# Altium PCB PCB1.PcbDoc
Units mil, origin at the board's own origin, x right, y up, seen from the top; angles counter-clockwise.
Board outline 6000 x 4000 mil, 2 copper layers (Top Layer, Bottom Layer); 21 components, 16 nets, 67 pads, 0 vias.
Unrouted connection lines stored in the file: 37.
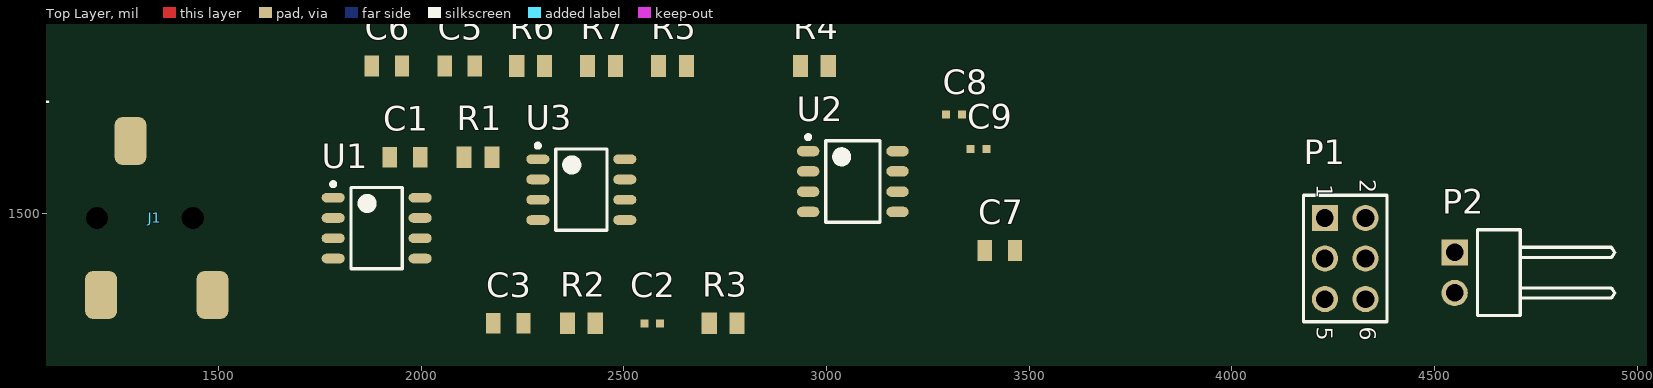
[diagram p0: Top Layer view]
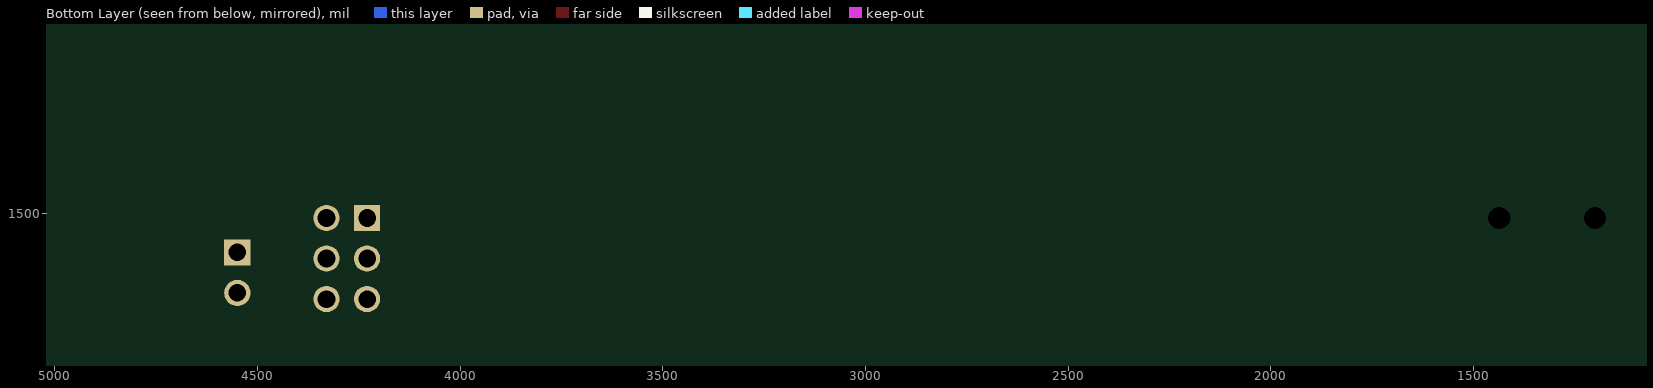
[diagram p1: Bottom Layer view, seen from below]

## Layer stack, top to bottom
Top Solder: solder mask 0.4, Solder Resist, Dk 3.5
Top Layer: signal copper 1.4
Dielectric 1: dielectric 12.6, FR-4, Dk 4.8
Bottom Layer: signal copper 1.4
Bottom Solder: solder mask 0.4, Solder Resist, Dk 3.5

## Board outline
1000,1000 7000,1000 7000,5000 1000,5000

## Design rules (kind name [scope] priority, off if disabled: settings)
Clearance [All] p1: gap=10 ignorepadtopadclearanceinfootprint=FALSE except(0: Arc-Hole Track-Hole SMDPad-Hole THPad-Hole Via-Hole Fill-Hole Poly-Hole Region-Hole Text-Hole)
PolygonConnect [All] p1: connectstyle=Relief reliefconductorwidth=10 reliefentries=4 polygonreliefangle="90 Angle" airgapwidth=10
RoutingVias [All] p1: holewidth=28 width=50 viastyle="Through Hole" minholewidth=28 minwidth=50 maxholewidth=28 maxwidth=50
SolderMaskExpansion [All] p1: expansion=4 istentingtop=FALSE
Width [All] p1: maxlimit=10 minlimit=10 preferedwidth=10
30 further rules are at their usual default settings.

## Components (designator, comment, footprint, x,y, rotation, side; value= is the part's Value field where it differs from the comment)
C1 "1uF" WCAP-CSGP_0805_H=1.25mm 1960,1640 r0 top
C2 "390nF" WCAP-CSGP_0402 2570,1230 r0 top
C3 "1uF" WCAP-CSGP_0805_H=1.25mm 2215,1230 r0 top
C5 "100nF" WCAP-CSGP_0805_H=1.25mm 2095,1865 r0 top
C6 "47uF" WCAP-CSGP_0805_H=1.25mm 1915,1865 r0 top
C7 "100nF" WCAP-CSGP_0805_H=1.25mm 3427.6,1410 r0 top
C8 "1nF" WCAP-CSGP_0402 3315,1745 r0 top
C9 "470pF" WCAP-CSGP_0402 3375,1660 r0 top
J1 "PJ-320B Audio Jack" "PJ-320B Audio Jack" 1280,1405 r270 top
P1 "61300621121" 61300621121 4280,1390 r270 top
P2 "61300211021" 61300211021 4659.06,1355 r90 top
R1 "100k" WRIS-PSMB_0805_H=0.22mm 2140,1640 r0 top
R2 "20k" WRIS-PSMB_0805_H=0.22mm 2395,1230 r0 top
R3 "20k" WRIS-PSMB_0805_H=0.22mm 2745,1230 r0 top
R4 "100k" WRIS-PSMB_0805_H=0.22mm 2970,1865 r0 top
R5 "100k" WRIS-PSMB_0805_H=0.22mm 2620,1865 r0 top
R6 "7.5k" WRIS-PSMB_0805_H=0.22mm 2270,1865 r0 top
R7 "7.5k" WRIS-PSMB_0805_H=0.22mm 2445,1865 r0 top
U1 "ATtiny102" ATtiny102 1890,1465 r0 top
U2 "TM8211" TM8211 3065,1580 r0 top
U3 "NS8002" NS8002 2395,1560 r0 top

## Footprints (in the part's own frame and the unit in brackets; to place one, negate y for a bottom-side part, rotate by r counter-clockwise, add the part's x,y. Pads: shape width x height; smd on the part's side, far side on the other; paste and mask are expansions set on the pad)
61300211021 [mm] "Pin Header, pitch 2.54 mm, THT, Angled, single row, 2p"
  rect 1.65x1.65 hole 1.1: 1(1.27,2.77)
  round 1.65 hole 1.1: 2(-1.27,2.77)
  silkscreen extent -2.69,-7.27 2.69,1.35, body extent -2.54,-7.27 2.54,3.09, height 2.58
61300621121 [mm] "Pin Header, pitch 2.54 mm, THT, Vertical, dual row, 6p"
  rect 1.65x1.65 hole 1.1: 1(-2.54,-1.27)
  round 1.65 hole 1.1: 2(-2.54,1.27) 3(0,-1.27) 4(0,1.27) 5(2.54,-1.27) 6(2.54,1.27)
  silkscreen extent -3.96,-2.62 3.96,2.62, body extent -3.81,-2.54 3.81,2.54, height 8.59
ATtiny102 [mm] "SOIC, 8-Leads, Body 4,93x3,90mm, Pitch 1,27mm, IPC Medium Density"
  oval 1.45x0.6 smd: 1(-2.725,1.905) 2(-2.725,0.635) 3(-2.725,-0.635) 4(-2.725,-1.905) 5(2.725,-1.905) 6(2.725,-0.635) 7(2.725,0.635) 8(2.725,1.905)
  silkscreen extent -2.85,-2.55 1.6,2.88, body extent -3,-2.55 3,2.55, height 1.75
NS8002 [mm] "Class AB 1.8W x 1 @ 4O 3V ~ 5.25V SOP-8_EP_150mil Audio Power OpAmps RoHSm, IPC Medium Density"
  oval 1.45x0.6 smd: 1(-2.725,1.905) 2(-2.725,0.635) 3(-2.725,-0.635) 4(-2.725,-1.905) 5(2.725,-1.905) 6(2.725,-0.635) 7(2.725,0.635) 8(2.725,1.905)
  silkscreen extent -2.85,-2.55 1.6,2.88, body extent -3,-2.55 3,2.55, height 1.7
"PJ-320B Audio Jack" [mil]
  rrect50% 118.11x78.74 smd: 1(105,-70) 2(-275,2.5) 3(105,205)
  round 0 hole 55.12: 3(-85,156.22) 3(-85,-80)
  body extent -303,-278 131,274, height 197
TM8211 [mm] "16-Bit SOP-8_150mil Digital To Analog Converter (DAC)"
  oval 1.4x0.65 smd: 1(-2.8,1.905) 2(-2.8,0.635) 3(-2.8,-0.635) 4(-2.8,-1.905) 5(2.8,-1.905) 6(2.8,-0.635) 7(2.8,0.635) 8(2.8,1.905)
  silkscreen extent -2.92,-2.55 1.7,2.9, body extent -3,-2.55 3,2.55, height 1.7
WCAP-CSGP_0402 [mm] "Ceramic Capacitors, body 1x0.5mm"
  rect 0.5x0.5 smd: 1(-0.5,0) 2(0.5,0)
  body extent -0.5,-0.25 0.5,0.25, height 0.5
WCAP-CSGP_0805_H=1.25mm [mm] "Ceramic Capacitors, body 2x1.25mm"
  rect 0.9x1.3 smd: 1(-0.95,0) 2(0.95,0)
  body extent -1,-0.62 1,0.63, height 1.25
WRIS-PSMB_0805_H=0.22mm [mm] "Metal Plate Resistor, SMT, body size 2x1.25mm"
  rect 0.95x1.36 smd: 1(-0.875,0) 2(0.875,0)
  body extent -1,-0.62 1,0.63, height 0.22

## Part data
C1 C3: library part 885012207022, "WCAP-CSGP General Purpose Ceramic Capacitors, size 0805, 1uF, +/-10%, 10VDC", Capacitance Tolerance=+/-10%, Isolation Resistance=>=0.5GOhm, Operating Temperature="-55 to +125degC", Rated Voltage=10VDC, Capacitance=1uF, Ceramic Type=X7R, ComponentLink1Description=Manufacturer, ComponentLink1URL=http://www.we-online.de, ComponentLink2Description=Datasheet, ComponentLink2URL=https://katalog.we-online.com/pbs/datasheet/885012207022.pdf, Dissipation Factor=#NAME?, Height="1.25mm +/-0.10mm", Mounting Technology=SMD, Packaging="Tape and Reel", Part Number=885012207022, Published Date="August 2019", Publisher="Wurth Elektronik", Size=0805, Technical Reference=X7R0805105K010DFCT10000
C2 C9: library part 885012205025, "WCAP-CSGP General Purpose Ceramic Capacitors, size 0402, 1nF, +/-10%, 16VDC", Capacitance=1nF, Capacitance Tolerance=+/-10%, Isolation Resistance=>=10GOhm, Operating Temperature="-55 to +125degC", Rated Voltage=16VDC, Ceramic Type=X7R, ComponentLink1Description=Manufacturer, ComponentLink1URL=http://www.we-online.de, ComponentLink2Description=Datasheet, ComponentLink2URL=https://katalog.we-online.com/pbs/datasheet/885012205025.pdf, Dissipation Factor=#NAME?, Height="0.5mm +/-0.05mm", Mounting Technology=SMD, Packaging="Tape and Reel", Part Number=885012205025, Published Date="August 2019", Publisher="Wurth Elektronik", Size=0402, Technical Reference=X7R0402102K016DFCT10000
C5 C6 C7: library part 885012207022, "WCAP-CSGP General Purpose Ceramic Capacitors, size 0805, 1uF, +/-10%, 10VDC", Capacitance=1uF, Capacitance Tolerance=+/-10%, Isolation Resistance=>=0.5GOhm, Operating Temperature="-55 to +125degC", Rated Voltage=10VDC, Ceramic Type=X7R, ComponentLink1Description=Manufacturer, ComponentLink1URL=http://www.we-online.de, ComponentLink2Description=Datasheet, ComponentLink2URL=https://katalog.we-online.com/pbs/datasheet/885012207022.pdf, Dissipation Factor=#NAME?, Height="1.25mm +/-0.10mm", Mounting Technology=SMD, Packaging="Tape and Reel", Part Number=885012207022, Published Date="August 2019", Publisher="Wurth Elektronik", Size=0805, Technical Reference=X7R0805105K010DFCT10000
C8: library part 885012205025, "WCAP-CSGP General Purpose Ceramic Capacitors, size 0402, 1nF, +/-10%, 16VDC", Capacitance Tolerance=+/-10%, Isolation Resistance=>=10GOhm, Operating Temperature="-55 to +125degC", Rated Voltage=16VDC, Capacitance=1nF, Ceramic Type=X7R, ComponentLink1Description=Manufacturer, ComponentLink1URL=http://www.we-online.de, ComponentLink2Description=Datasheet, ComponentLink2URL=https://katalog.we-online.com/pbs/datasheet/885012205025.pdf, Dissipation Factor=#NAME?, Height="0.5mm +/-0.05mm", Mounting Technology=SMD, Packaging="Tape and Reel", Part Number=885012205025, Published Date="August 2019", Publisher="Wurth Elektronik", Size=0402, Technical Reference=X7R0402102K016DFCT10000
P1: "WR-PHD Pin Header, THT, pitch 2.54mm, Dual Row, Vertical, 6p", Contact Resistance=20mOhm, Manufacturer="Wurth Elektronik", Operating Temperature="-40 to +105degC", Rated Current=3A, Withstanding Voltage=500VAC, Working Voltage=250VAC, ComponentLink1Description=Manufacturer, ComponentLink1URL=http://www.we-online.de, ComponentLink2Description=Datasheet, ComponentLink2URL=https://www.we-online.com/catalog/datasheet/61300621121.pdf, Gender="Pin Header", Manufacturer Part Number=61300621121, Mounting Technology=THT, Orientation=Vertical, Packaging=Bag, Pin Number=6, Pitch=2.54mm, Published Date="May 2020", Row Number=Dual
P2: "WR-PHD Pin Header, THT, pitch 2.54mm, Single Row, Angled, 2p", Contact Resistance=20mOhm, Manufacturer="Wurth Elektronik", Operating Temperature="-40 to +105degC", Rated Current=3A, Withstanding Voltage=500VAC, Working Voltage=250VAC, ComponentLink1Description=Manufacturer, ComponentLink1URL=http://www.we-online.de, ComponentLink2Description=Datasheet, ComponentLink2URL=https://www.we-online.com/catalog/datasheet/61300211021.pdf, Gender="Pin Header", Manufacturer Part Number=61300211021, Mounting Technology=THT, Orientation=Angled, Packaging=Bag, Pin Number=2, Pitch=2.54mm, Published Date="May 2020", Row Number=Single
R1 R2 R3 R4 R5 R6 R7: library part 580060720008, "WRIS-PSMB Metal Plate Resistors, size 0805, 10mOhm, +/-1%, 0.5W", Operating Temperature="-55 to +155degC", Rated Current=7.07A, Rated Power=0.5W, Resistance=10mOhm, Resistance Tolerance=+/-1%, Temperature Coefficient of Resistance=+/-100ppm/degC, ComponentLink1Description=Manufacturer, ComponentLink1URL=http://www.we-online.de, ComponentLink2Description=Datasheet, ComponentLink2URL=https://katalog.we-online.com/pbs/datasheet/580060720008.pdf, Height=0.22mm, Length=2mm, Mounting Technology=SMT, Packaging="Tape and Reel", Part Number=580060720008, Published Date="September 2019", Publisher="Wurth Elektronik", Size=0805, Technical Reference=MB0805R010F102KAATP0000, Width=1.25mm

## Nets (pads, with @x,y where several pads share a name; then routed paths per layer and width w, separated by ;. In a path a pad name is that pad's centre, name@x,y a point inside that pad or via, vN(x,y) a via of type N, cw(c..) or ccw(c..) an arc to the next point about the centre after c; other vN are vias at no path point)
5V: C3.1 C5.1 C6.1 C7.1 P1.2 R1.2 R4.1 U1.1 U2.5 U3.6
"Audio IN": J1.2 R4.2 R5.1 U1.5
"DAC OUT": C2.2
GND: C1.1 C3.2 C5.2 C6.2 C7.2 C9.1 J1.1 P1.6 R5.2 U1.8 U2.4 U3.7
NetC1_2: C1.2 U3.2 U3.3
NetC2_1: C2.1 R2.2
NetC8_1: C8.1 R6.2 R7.1
NetC9_2: C9.2 R7.2
NetR1_1: R1.1 U3.1
NetR2_1: R2.1 R3.2 U3.4
NetR6_1: R6.1 U2.6
RESET: P1.5 U1.4
"Speaker High": P2.1 R3.1 U3.5
"Speaker Low": P2.2 U3.8
TPICLK: P1.3
TPIDATA: P1.1
pads on no net: C8.2 J1.3 P1.4 U1.2 U1.3 U1.6 U1.7 U2.1 U2.2 U2.3 U2.7 U2.8

## Text inside footprints (layer, text, board x,y; h text height)
P1: Top Overlay "6" at 4315.43,1221.89 h40 r270; Top Overlay "5" at 4209.13,1221.89 h40 r270; Top Overlay "2" at 4315.43,1585.67 h40 r270; Top Overlay "1" at 4209.13,1573.86 h40 r270